# Allegro board gsm.brd
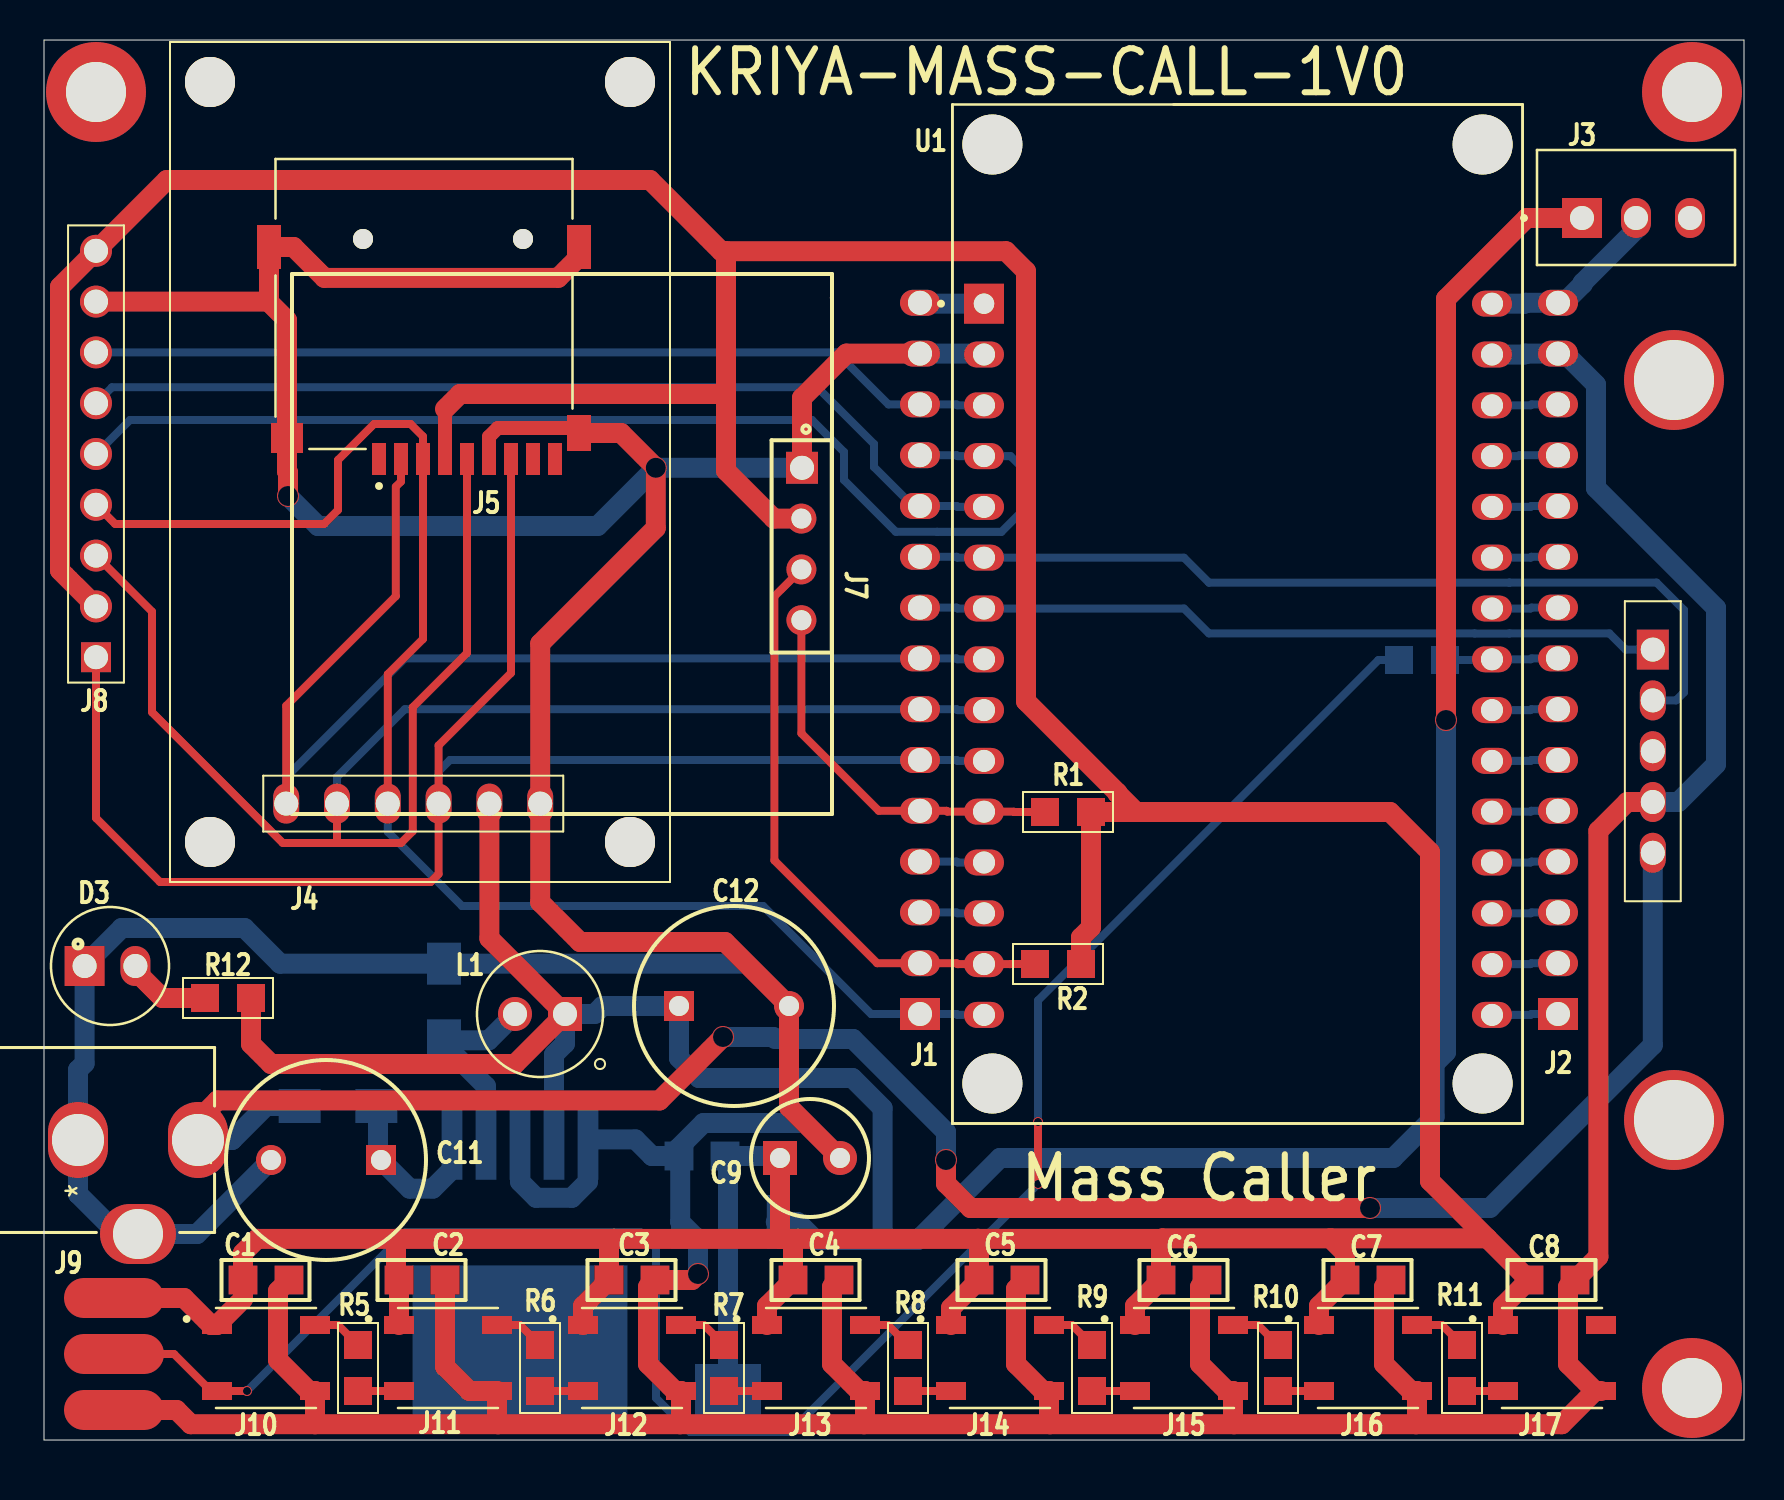
[diagram p0: board, top side]
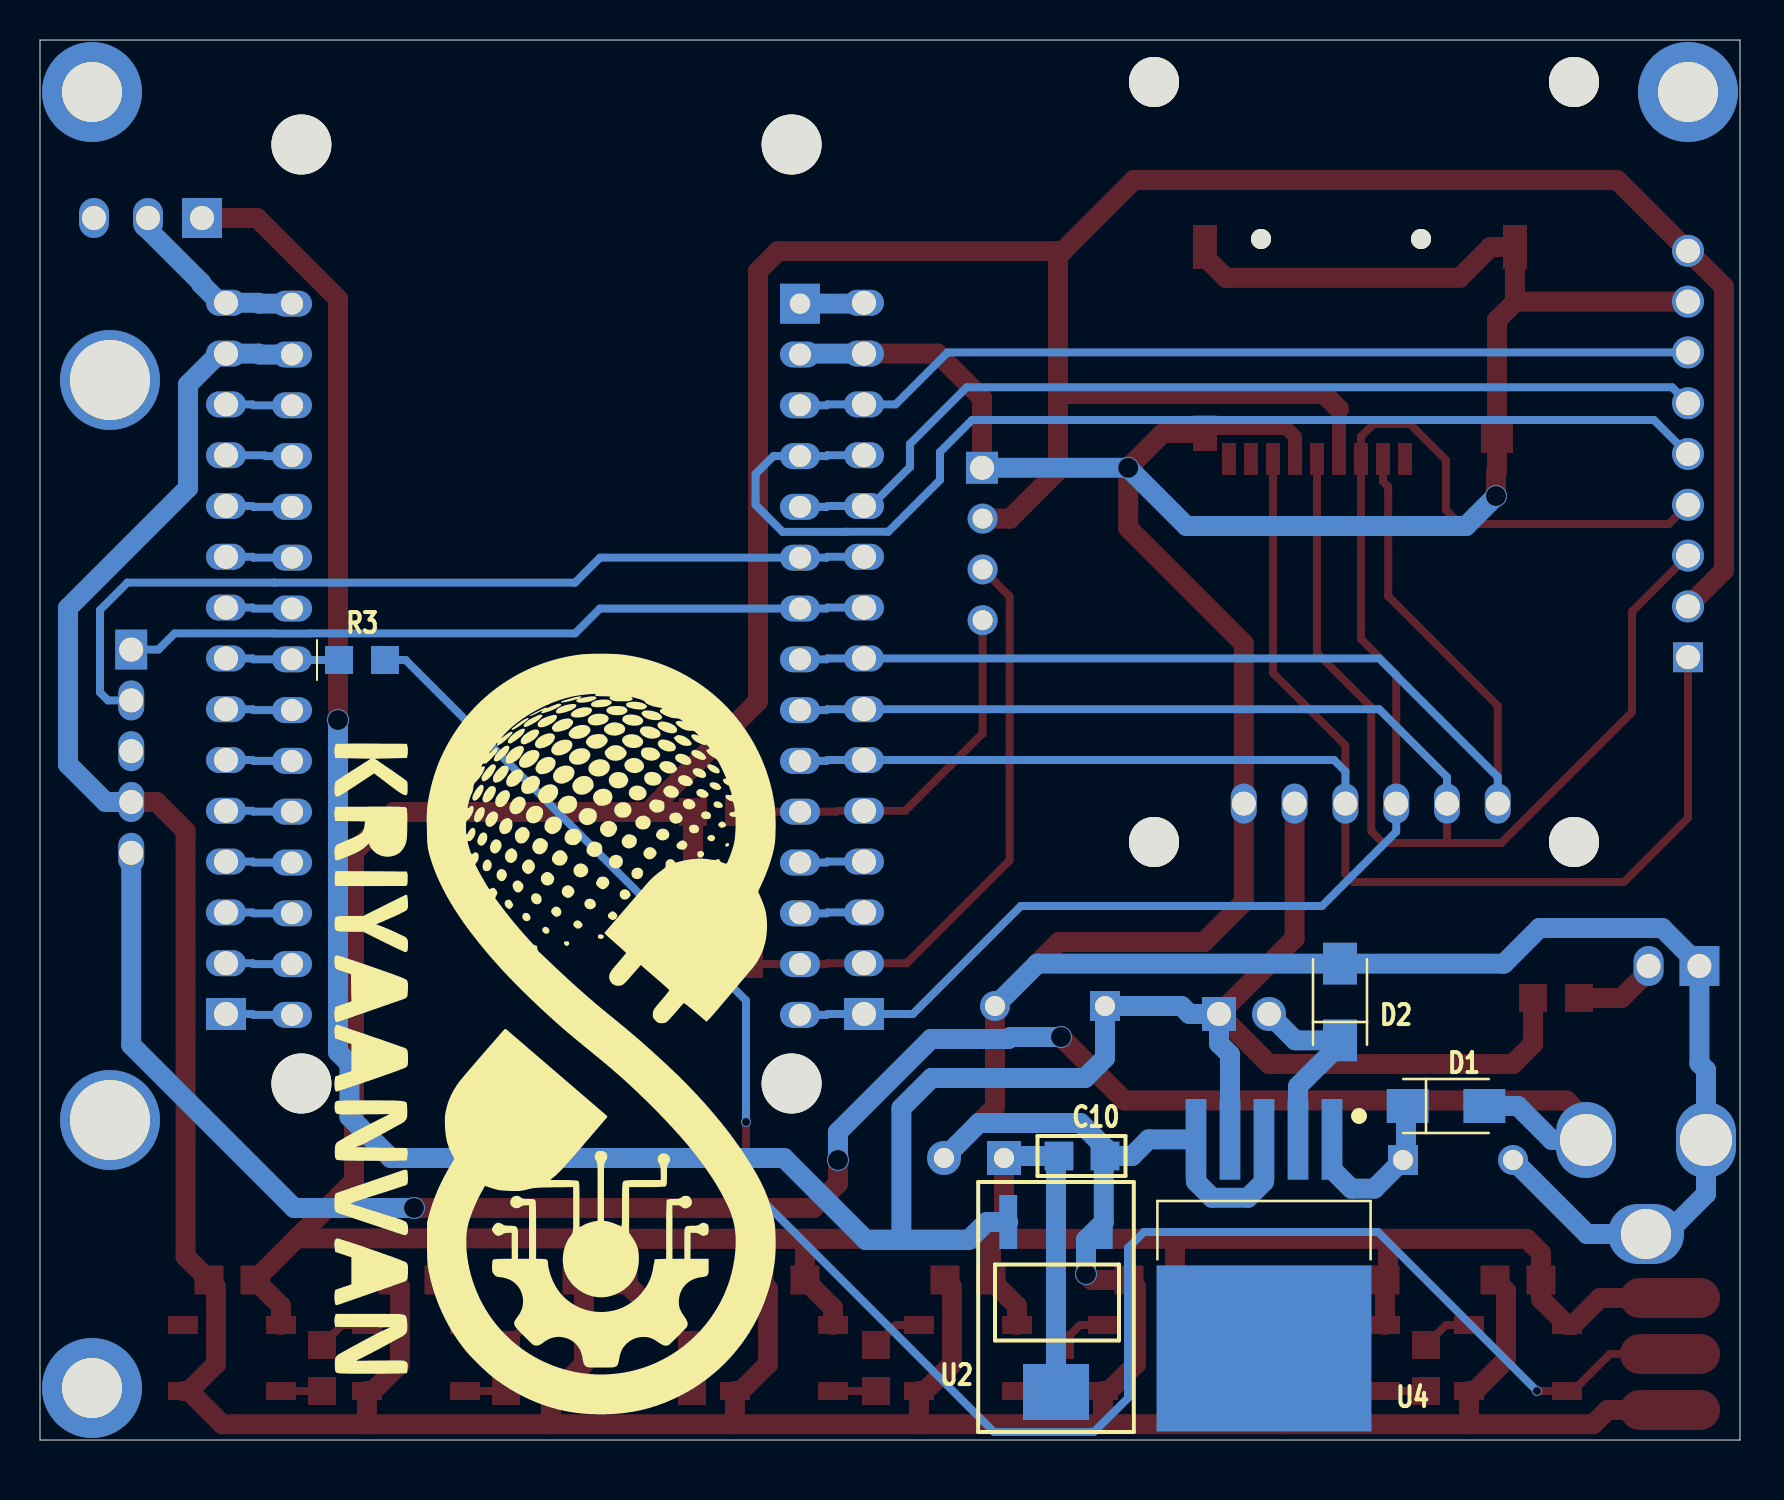
[diagram p1: board, bottom side, seen from below]

Outline 85 x 70 mm; copper layers: TOP, BOTTOM. Coordinates in mm from the lower left corner of the outline.
Outline path: 0,70 0,0 85,0 85,70 0,70

## Design rules (mm)
constraint set DEFAULT: min track width 0.4, pair gap 0.4

## Placement (name value [footprint] x y rotation side)
C1  0.1uf  [SMD_CAP_0805]  11.1 8 0 top
C2  0.1uf  [SMD_CAP_0805]  18.9 8 0 top
C3  0.1uf  [SMD_CAP_0805]  29.4 8 0 top
C4  0.1uf  [SMD_CAP_0805]  38.6 8 0 top
C5  0.1uf  [SMD_CAP_0805]  47.9 8 0 top
C6  0.1uf  [SMD_CAP_0805]  57 8 0 top
C7  0.1uf  [SMD_CAP_0805]  66.2 8 0 top
C8  0.1uf  [SMD_CAP_0805]  75.4 8 0 top
C9  47uF/10V  [TH_CAPACITOR]  36.8 14.1 0 top
C10  0.1uf  [SMD_CAP_0805]  32.9 14.2 180 bottom
C11  100uF/25V/TH  [CAP_TH_1000]  14.1 14 180 top
C12  1000uF/16V/TH  [CAP_TH_1000]  34.5 21.7 0 top
D1  M7  [DIODE_SMD_WITH_SS]  14.7 16.7 180 bottom
D2  SS34  [DIODE_SMD_WITH_SS]  20 21.9 90 bottom
D3  LED  [LED_5MM]  3.3 23.7 0 top
J1  CON15  [COMP_BERG_2_54_POS_15]  43.8 21.3 90 top
J2  CON15  [COMP_BERG_2_54_POS_15]  75.7 21.3 90 top
J3  Sliding_SW  [SWITCH]  79.6 61.1 0 top
J4  Micro SD Card Adapter  [MICRO_SD_C]  6.3 27.9 90 top
J5  CON9  [CUI_MSD-1-A]  19 56.8 180 top
J6  GSM  [SIM800C]  78.5 56 0 top
J7  OLED  [OLED_0_96_WMH]  37.9 44.8 270 top
J8  CON9  [CBOX_9]  2.6 49.3 180 top
J9  CON3  [WS2812_STRIP]  3.5 4.3 0 top
J10  CON4  [WS2812]  11.1 4.1 0 top
J11  CON4  [WS2812]  20.2 4.1 0 top
J12  CON4  [WS2812]  29.4 4.1 0 top
J13  CON4  [WS2812]  38.6 4.1 0 top
J14  CON4  [WS2812]  47.8 4.1 0 top
J15  CON4  [WS2812]  57 4.1 0 top
J16  CON4  [WS2812]  66.2 4.1 0 top
J17  CON4  [WS2812]  75.4 4.1 0 top
J18  JACK_PJ-002B  [PJ-002B_CUI]  7.7 15 90 top
L1  100uH/TH  [TH_INDUCTOR]  24.8 21.3 180 top
NOREF  -  [unnamed]  -156.36 -138.34 0 top
NOREF#2  -  [unnamed]  -236.16 -138.34 0 top
NOREF#3  -  [unnamed]  -156.36 -203.14 0 top
NOREF#4  -  [#2]  -7 153.98 0 top
R1  4.7K/0805  [SMD_RES_0805_23]  51.2 31.4 0 top
R2  4.7K/0805  [SMD_RES_0805_23]  50.7 23.8 0 top
R3  330E  [SMD_RES_0805_23]  68.9 39 180 bottom
R5  100E/0805  [SMD_RES_0805_23]  15.7 3.6 90 top
R6  100E/0805  [SMD_RES_0805_23]  24.8 3.6 90 top
R7  100E/0805  [SMD_RES_0805_23]  34 3.6 90 top
R8  100E/0805  [SMD_RES_0805_23]  43.2 3.6 90 top
R9  100E/0805  [SMD_RES_0805_23]  52.4 3.6 90 top
R10  100E/0805  [SMD_RES_0805_23]  61.7 3.6 90 top
R11  100E/0805  [SMD_RES_0805_23]  70.9 3.6 90 top
R12  1K/0805  [SMD_RES_0805_23]  9.2 22.1 180 top
U1  ESP32 DEV KIT  [MODULE_ESP32_DEVKIT]  59.7 41.3 0 top
U2  LM1117  [SMD_3_3VREGULATOR]  34.2 6.9 180 bottom
U4  SMD LM2576-5  [REGULATOR_LM2576-12WU]  23.8 8.7 0 bottom

## Library data of the parts
C1-C8 = CAPACITOR NON-POL
C9 = CAP
C10 = CAP NP
C11 C12 = CAPACITOR
D1 = DIODE
D2 = DIODE ZENER
D3 = LED
J1 = CON19_6
J2 = CON19_5
J3 J9 = CON3
J4 = CON6
J5 = CON9_5
J6 = CON5
J7 = CON4_2
J8 = CON9
J10-J17 = CON4
J18 = PJ-002B
L1 = INDUCTOR
R1 R2 = R
R3 R5-R12 = RESISTOR
U1 = CON34A_6
U2 = LM1117_5
U4 = LM2576/TO_1

## Footprints (pads in the part's own frame, mm; a bottom-side part is the same pattern mirrored in y, then rotated)
CAP_TH_1000
  rect 1.5x1.5 hole 1: 1(-2.75,0)
  round 1.5 hole 1: 2(2.75,0)
CBOX_9
  rect 1.5x1.5 hole 1.2: 1(0,10.16)
  round 1.6 hole 1.2: 2(0,7.62) 3(0,5.08) 4(0,2.54) 5(0,0) 6(0,-2.54) 7(0,-5.08) 8(0,-7.62) 9(0,-10.16)
COMP_BERG_2_54_POS_15
  rect 1.6x2 hole 1.2: 1(0,0)
  oval 1.3x2 hole 1.2: 2(2.54,0) 3(5.08,0) 4(7.62,0) 5(10.16,0) 6(12.7,0) 7(15.24,0) 8(17.78,0) 9(20.32,0) 10(22.86,0) 11(25.4,0) 12(27.94,0) 13(30.48,0) 14(33.02,0) 15(35.56,0)
CUI_MSD-1-A
  round 1 hole 1 unplated: (-4.95,-3.25) (3.05,-3.25)
  rect 0.7x1.6 smd: 1(2.25,7.75) 2(1.15,7.75) 3(0.05,7.75) 4(-1.05,7.75) 5(-2.15,7.75) 6(-3.25,7.75) 7(-4.35,7.75) 8(-5.45,7.75) CD(-6.55,7.75)
  rect 1.2x1.8 smd: G1(-7.75,6.45)
  rect 1.6x1.5 smd: G2(6.85,6.7)
  rect 1.2x2.2 smd: G3(-7.75,-2.85) G4(7.75,-2.85)
DIODE_SMD_WITH_SS
  rect 2.1x1.7 smd: 1(-1.915,0) 2(1.915,0)
LED_5MM
  rect 2x2 hole 1.2: 1(-1.27,0)
  oval 1.5x2 hole 1.2: 2(1.27,0)
MICRO_SD_C
  round 2.5 hole 2.5: (2,-2) (2,-23) (40,-2) (40,-23)
  oval 2x1.3 hole 1.2: 1(3.92,-5.81) 2(3.92,-8.35) 3(3.92,-10.89) 4(3.92,-13.43) 5(3.92,-15.97) 6(3.92,-18.51)
MODULE_ESP32_DEVKIT
  round 3 hole 3 unplated: (-12.28,23.475) (-12.28,-23.475) (12.23,23.475) (12.23,-23.475)
  rect 2x2 hole 1.02: 1(-12.7,15.515)
  oval 2x1.3 hole 1.1: 2(-12.7,12.975) 3(-12.7,10.435) 4(-12.7,7.895) 5(-12.7,5.355) 6(-12.7,2.815) 7(-12.7,0.275) 8(-12.7,-2.265) 9(-12.7,-4.805) 10(-12.7,-7.345) 11(-12.7,-9.885) 12(-12.7,-12.425) 13(-12.7,-14.965) 14(-12.7,-17.505) 15(-12.7,-20.045) 16(12.7,-20.045) 17(12.7,-17.505) 18(12.7,-14.965) 19(12.7,-12.425) 20(12.7,-9.885) 21(12.7,-7.345) 22(12.7,-4.805) 23(12.7,-2.265) 24(12.7,0.275) 25(12.7,2.815) 26(12.7,5.355) 27(12.7,7.895) 28(12.7,10.435) 29(12.7,12.975) 30(12.7,15.515)
OLED_0_96_WMH
  rect 1.6x1.6 hole 1.2: 1(-3.81,0)
  round 1.5 hole 1: 2(-1.27,-0.03) 3(1.27,-0.03) 4(3.81,-0.03)
PJ-002B_CUI
  oval 3.8x3 hole 2.6: 1(0,0) 2(0,6)
  oval 3x3.8 hole 2.5: 3(-4.7,3)
REGULATOR_LM2576-12WU
  rect 1.041x4.039 smd: 1(-3.4,-6.33) 2(-1.7,-6.33) 3(0,-6.33) 4(1.7,-6.33) 5(3.4,-6.33)
  rect 10.744x8.306 smd: 6(0,4.122)
SIM800C
  round 5 hole 4: (3,-3) (3,-40)
  rect 1.6x2 hole 1.2: 1(1.94,-16.48)
  oval 1.3x2 hole 1.2: 2(1.94,-19.02) 3(1.94,-21.56) 4(1.94,-24.1) 5(1.94,-26.64)
SMD_3_3VREGULATOR
  rect 0.9x2.7 smd: 1(2.39,4) 2(0,4) 3(-2.39,4)
  rect 3.3x2.8 smd: 4(0,-4.5)
SMD_CAP_0805
  rect 1.45x1.45 smd: 1(-1.15,0) 2(1.15,0)
SMD_RES_0805_23
  rect 1.4x1.4 smd: 1(-1.15,0) 2(1.15,0)
SWITCH
  rect 2x2 hole 1.2: 1(-2.7,0)
  oval 1.5x2 hole 1.2: 2(0,0) 3(2.7,0)
TH_CAPACITOR
  rect 1.7x1.7 hole 1: 1(0,0)
  round 1.7 hole 1: 2(3,0)
TH_INDUCTOR
  round 1.7 hole 1.2: 1(1.25,0)
  rect 1.7x1.7 hole 1.2: 2(-1.25,0)
unnamed
  round 5 hole 3: (238.76,205.74)
WS2812
  rect 1.5x0.9 smd: 1(-2.45,1.65) 2(-2.45,-1.65) 3(2.45,-1.65) 4(2.45,1.65)
WS2812_STRIP
  oval 5x2 smd: 1(0,2.8) 2(0,0) 3(0,-2.8)

## Nets
3V3: C1.1 C2.1 C3.1 C4.1 C5.1 C6.1 C7.1 C8.1 C9.1 C10.1 J5.4 J7.2(VCC) J8.2 J8.9 J9.1 J10.1 J11.1 J12.1 J13.1 J14.1 J15.1 J16.1 J17.1 R1.2 R2.2 U2.2 U2.4(VOUT4)
12V: D1.2 J6.5 J18.1
+5V: C12.1 J3.1 J4.5 L1.2 R12.1 U2.3 U4.4
GND: C1.2 C2.2 C3.2 C4.2 C5.2 C6.2 C7.2 C8.2 C9.2 C10.2 C11.2 C12.2 D2.2 D3.1(CATHODE) J1.14 J2.14 J4.6 J5.6(VSS) J5.G1 J5.G2 J5.G3 J5.G4 J6.4 J7.1 J8.8 J9.3 J10.3 J11.3 J12.3 J13.3 J14.3 J15.3 J16.3 J17.3 J18.2 J18.3 U1.2 U1.29 U2.1 U4.3 U4.5
CS_ILI: J1.13 J8.7 U1.3
D/C_ILI: J1.12 J8.5 U1.4
EN: J2.1 U1.16
ESP_3V3: J1.15 U1.1
MISO_ILI: J1.6 J4.4 J5.7 J8.1 U1.10
MOSI_ILI: J1.1 J4.3 J5.3 J8.4 U1.15
RESET_ILI: J1.11 J8.6 U1.5
RX: J1.10 J6.2 U1.6
SCK_ILI: J1.7 J4.2 J5.5 J8.3 U1.9
SCL: J1.2 J7.3 R2.1 U1.14
SDA: J1.5 J7.4 R1.1 U1.11
T_CS: J1.8 J4.1 J5.2 U1.8
TX: J1.9 J6.1 U1.7
WS_IN1: J9.2 J10.2 R3.2
WS_OUT1: J10.4 R5.2
WS_OUT2: J11.4 R6.2
WS_OUT3: J12.4 R7.2
WS_OUT4: J13.4 R8.2
WS_OUT5: J14.4 R9.2
WS_OUT6: J15.4 R10.2
WS_OUT7: J16.4 R11.2
N2742876: J2.15 J3.2 U1.30(VIN)
N2742884: J2.13 U1.28
N2742888: J2.12 U1.27
N2742892: J2.11 U1.26
N2742896: J2.10 U1.25
N2742900: J2.9 U1.24
N2742904: J2.8 R3.1 U1.23
N2742908: J2.7 U1.22
N2742912: J2.6 U1.21
N2742916: J2.5 U1.20
N2742920: J2.4 U1.19
N2742924: J2.3 U1.18
N2742928: J2.2 U1.17
N2742950: J1.3 U1.13
N2742954: J1.4 U1.12
N2860818: C11.1 D1.1(K) U4.1(VIN)
N2860900: D2.1(CATHODE) L1.1 U4.2
N2865417: J11.2 R5.1
N2865707: J12.2 R6.1
N2866012: J13.2 R7.1
N2866325: J14.2 R8.1
N2873565: J15.2 R9.1
N2873897: J16.2 R10.1
N2874241: J17.2 R11.1
N28757371: D3.2 R12.2

Pads without a net: J3 3; J5 1 8 CD; J6 3; J17 4; U4 6

## Via types
v1: diameter 1.1, hole 1, TOP to BOTTOM, 7 vias
v2: diameter 0.5, hole 0.4, TOP to BOTTOM, 3 vias

## Routing (per net, layer and track width the routed paths; a pad name or vN(x,y) marks a point on that pad's centre or on a via; arc(x,y) is an arc through that point)
3V3: length 303.1
  TOP w0.7: J5.4 20.05,51.55
  TOP w1: 37.7,10.06 36.8,10.06 ; 37.7,10.06 46.7,10.06 ; 37.7,10.06 37.45,9.81 C4.1 36.15,6.7 J13.1 ; 36.8,10.06 28.5,10.06 ; 36.8,10.06 C9.1 ; J17.1 72.95,6.7 C8.1 72.17,10.08 ; 64.32,10.08 72.17,10.08 ; 64.32,10.08 55.92,10.08 55.9,10.06 ; 64.32,10.08 65.05,9.35 C7.1 63.75,6.7 J16.1 ; 72.17,10.08 69.3,12.95 69.3,29.4 67.3,31.4 54.6,31.4 ; 34.1,52.3 20.8,52.3 20.05,51.55 ; 34.1,52.3 34.1,48.46 36.49,46.07 J7.2 ; 34.1,52.3 34.1,59.44 ; 28.5,10.06 17.6,10.06 ; 28.5,10.06 28.25,9.81 C3.1 26.95,6.7 J12.1 ; J14.1 45.35,6.6 C5.1 46.75,10.01 46.7,10.06 ; 17.6,10.06 17.6,8.15 C2.1 J11.1 ; 17.6,10.06 10.66,10.06 9.95,9.35 C1.1 9.95,7.05 J10.1 8.35,5.75 7,7.1 J9.1 ; J15.1 54.55,6.7 C6.1 55.85,10.01 55.9,10.06 ; 55.9,10.06 46.7,10.06 ; 54.6,31.4 53.68,32.32 53.68,32.36 49.1,36.94 49.1,58.44 48.1,59.44 34.1,59.44 ; 54.6,31.4 R1.2 52.35,25.63 51.85,25.13 R2.2 ; 34.1,59.44 33.86,59.44 30.3,63 6.14,63 J8.9 0.8,57.66 0.8,43.48 J8.2
  BOTTOM w1: U2.4 U2.2 34.2,14.05 C10.1 36.7,14.2 C9.1
12V: length 99.3
  TOP w1: J18.1 7.7,16 8.67,16.98 30.78,16.98 v1(33.95,20.15) ; v1(45.1,14) 45.1,12.82 46.32,11.6 v1(66.3,11.6)
  BOTTOM w1: v1(33.95,20.15) 36.47,20.15 36.57,20.05 40.45,20.05 45.1,15.4 v1(45.1,14) ; D1.2 11.11,16.7 9.41,15 J18.1 ; J6.5 80.44,19.75 72.29,11.6 v1(66.3,11.6)
+5V: length 149.8
  TOP w1: v1(70.1,36) 70.1,57.06 74.14,61.1 J3.1 ; J4.5 22.27,25.08 L1.2 23.55,18.8 11.35,18.8 10.35,19.8 R12.1
  BOTTOM w1: v1(70.1,36) 70.1,19.39 69.53,18.82 69.53,16.17 67.46,14.1 47.8,14.1 43.7,10 41.93,10 ; U4.4 25.5,19.27 26.05,19.82 L1.2 27.53,21.3 27.93,21.7 C12.1 31.75,19.1 32.75,18.1 40.42,18.1 41.93,16.59 41.93,10 ; U2.3 37.67,10.9 38.57,10 41.93,10
GND: length 427.9
  TOP w0.7: J5.6 22.25,50.16 22.69,50.6 26.5,50.6 J5.G1
  TOP w1: J5.G1 28.85,50.35 v1(30.59,48.61) 30.59,45.6 24.81,39.82 J4.6 24.81,26.89 26.8,24.9 34.05,24.9 C12.2 37.25,16.65 C9.2 ; J5.G3 26.75,59.15 25.71,58.11 14.02,58.11 12.48,59.65 J5.G4 11.25,56.95 11.22,56.92 ; 13.55,0.79 7.34,0.79 6.63,1.5 J9.3 ; 13.55,0.79 22.7,0.79 ; 13.55,0.79 J10.3 13.25,2.45 11.7,4 11.7,7.45 C1.2 ; C4.2 39.4,7.65 39.4,3.8 40.75,2.45 J13.3 41.05,0.84 41,0.79 ; 22.7,0.79 22.65,0.84 J11.3 21.27,2.45 20.05,3.67 C2.2 ; 22.7,0.79 31.8,0.79 ; v1(32.7,8.3) 32.4,8 C3.2 30.2,7.65 30.2,3.8 31.55,2.45 J12.3 31.85,0.84 31.8,0.79 ; 31.8,0.79 41,0.79 ; 11.22,56.92 12.15,55.99 J5.G2 12.15,48.43 12.2,48.38 v1(12.2,47.2) ; 11.22,56.92 J8.8 ; 68.6,0.79 75.89,0.79 77.55,2.45 ; 68.6,0.79 59.5,0.79 ; 68.6,0.79 68.65,0.84 J16.3 68.35,2.45 67,3.8 67,7.65 C7.2 ; C5.2 48.6,7.55 48.6,3.8 49.95,2.45 J14.3 50.25,0.84 50.3,0.79 ; 77.55,2.45 J17.3 ; 77.55,2.45 76.2,3.8 76.2,7.65 C8.2 77.72,9.17 77.72,30.46 79.16,31.9 J6.4 ; 50.3,0.79 41,0.79 ; 50.3,0.79 59.5,0.79 ; C6.2 57.8,7.65 57.8,3.8 59.15,2.45 J15.3 59.45,0.84 59.5,0.79 ; J7.1 37.9,52.1 40.12,54.32 J1.14
  BOTTOM w1: U4.3 23.8,12.92 24.61,12.11 26.39,12.11 27.2,12.92 U4.5 29.57,15.03 30.4,14.2 C10.2 ; J7.1 v1(30.59,48.61) 27.68,45.7 13.7,45.7 v1(12.2,47.2) ; C12.2 35.13,23.81 D2.2 11.81,23.81 10.02,25.6 3.89,25.6 2.03,23.74 D3.1 2.03,18.84 1.7,18.51 J18.2 1.7,12.3 3.7,10.3 J18.3 7.65,10.3 C11.2 ; U1.29 74.03,54.27 74.07,54.32 J2.14 76.05,54.32 77.6,52.77 77.6,47.6 83.6,41.6 83.6,33.78 81.72,31.9 J6.4 ; C10.2 31.75,14.62 32.98,15.85 38.05,15.85 C9.2 ; C10.2 31.81,14.14 U2.1 32.7,10.01 v1(32.7,8.3) ; U1.2 46.95,54.32 J1.14
CS_ILI: length 45.5
  BOTTOM w0.4: J8.7 39.62,54.38 42.22,51.78 J1.13 45.63,51.78 45.67,51.73 U1.3
D/C_ILI: length 58.4
  BOTTOM w0.4: J8.5 4.3,51 38.4,51 40,49.4 40,48 42.59,45.41 44.67,45.41 44.67,45.41 47.87,45.41 49.22,46.76 49.22,48.3 48.33,49.2 U1.4 45.67,49.2 45.63,49.24 J1.12
EN: length 3.3
  BOTTOM w0.4: J2.1 74.37,21.3 74.33,21.26 72.4,21.26
ESP_3V3: length 3.2
  BOTTOM w1: J1.15 43.84,56.81 U1.1
MISO_ILI: length 78
  TOP w0.4: J5.7 23.35,38.35 19.73,34.73 J4.4 19.73,28.3 19.33,27.9 5.8,27.9 2.6,31.1 J8.1
  BOTTOM w0.4: J4.4 19.73,33.43 20.3,34 J1.6 45.63,34 45.67,33.95 U1.10
MOSI_ILI: length 74.6
  TOP w0.4: J8.4 3.56,45.8 14,45.8 14.7,46.5 14.7,49 16.5,50.8 18.33,50.8 18.95,50.18 J5.3 18.95,40.05 17.19,38.29 J4.3
  BOTTOM w0.4: 47,21.26 45.67,21.26 45.63,21.3 J1.1 41.36,21.3 35.96,26.7 20.9,26.7 17.19,30.41 J4.3
RESET_ILI: length 47.9
  BOTTOM w0.4: U1.5 45.67,46.66 45.63,46.7 J1.11 43.45,46.7 41.5,48.65 41.5,49.8 38.66,52.64 3.4,52.64 J8.6
RX: length 45.2
  BOTTOM w0.4: J1.10 45.63,44.16 45.67,44.11 U1.6 57,44.11 58.25,42.86 73.27,42.86 73.27,42.87 80.63,42.87 82,41.5 82,37.38 81.6,36.98 J6.2
SCK_ILI: length 81.8
  TOP w0.4: J5.5 21.15,39.35 18.44,36.64 18.44,30.44 17.85,29.85 14.65,29.85 ; 14.65,29.85 11.94,29.85 5.4,36.39 5.4,41.42 J8.3 ; 14.65,29.85 J4.2
  BOTTOM w0.4: U1.9 45.67,36.49 45.63,36.54 J1.7 18.04,36.54 14.65,33.15 J4.2
SCL: length 30.3
  TOP w0.4: J7.3 36.52,42.18 36.52,28.98 41.66,23.84 J1.2 45.63,23.84 45.67,23.8 U1.14 48.33,23.8 48.33,23.8 R2.1
SDA: length 19.5
  TOP w0.4: R1.1 48.51,31.4 48.49,31.41 U1.11 45.17,31.41 45.13,31.46 J1.5 41.74,31.46 37.87,35.33 J7.4
T_CS: length 58.3
  TOP w0.4: J5.2 17.85,47.92 17.59,47.66 17.59,42.19 12.11,36.71 J4.1
  BOTTOM w0.4: J4.1 12.11,33.15 18.04,39.08 J1.8 45.63,39.08 45.67,39.03 U1.8
TX: length 37.5
  BOTTOM w0.4: J6.1 79.08,39.52 78.27,40.33 73.27,40.33 73.27,40.33 71.53,40.33 71.53,40.33 58.24,40.33 57,41.58 U1.7 45.67,41.58 45.63,41.62 J1.9
WS_IN1: length 98.2
  TOP w0.4: v2(10.15,2.45) J10.2 8.35,2.45 6.5,4.3 J9.2 ; v2(49.7,15.9) v2(49.7,12.8)
  BOTTOM w0.4: v2(10.15,2.45) 18.1,10.4 29.8,10.4 30.6,9.6 30.6,2.1 32.3,0.4 37.3,0.4 v2(49.7,12.8) ; v2(49.7,15.9) 49.7,21.98 66.72,39 R3.2
WS_OUT1: length 2.6
  TOP w0.4: J10.4 14.7,5.75 R5.2
WS_OUT2: length 2.6
  TOP w0.4: R6.2 23.8,5.75 J11.4
WS_OUT3: length 2.6
  TOP w0.4: J12.4 33,5.75 R7.2
WS_OUT4: length 2.6
  TOP w0.4: R8.2 42.2,5.75 J13.4
WS_OUT5: length 2.6
  TOP w0.4: J14.4 51.4,5.75 R9.2
WS_OUT6: length 2.7
  TOP w0.4: J15.4 60.7,5.75 R10.2
WS_OUT7: length 2.7
  TOP w0.4: J16.4 69.9,5.75 R11.2
N2742876: length 9.3
  BOTTOM w1: J3.2 79.6,60.53 76.94,57.87 76.94,57.8 76,56.86 J2.15 74.07,56.86 74.03,56.81 U1.30
N2742884: length 3.3
  BOTTOM w0.4: J2.13 74.37,51.78 74.33,51.73 U1.28
N2742888: length 3.3
  BOTTOM w0.4: J2.12 73.77,49.24 73.73,49.2 U1.27
N2742892: length 3.3
  BOTTOM w0.4: U1.26 74.33,46.66 74.37,46.7 J2.11
N2742896: length 3.3
  BOTTOM w0.4: J2.10 74.37,44.16 74.33,44.11 U1.25
N2742900: length 3.3
  BOTTOM w0.4: J2.9 74.37,41.62 74.33,41.58 U1.24
N2742904: length 5.7
  BOTTOM w0.4: J2.8 74.37,39.08 74.33,39.03 U1.23 72.36,39 R3.1
N2742908: length 3.3
  BOTTOM w0.4: U1.22 74.33,36.49 74.37,36.54 J2.7
N2742912: length 3.3
  BOTTOM w0.4: J2.6 74.37,34 74.33,33.95 U1.21
N2742916: length 3.3
  BOTTOM w0.4: U1.20 74.33,31.41 74.37,31.46 J2.5
N2742920: length 3.3
  BOTTOM w0.4: J2.4 74.37,28.92 74.33,28.88 U1.19
N2742924: length 3.3
  BOTTOM w0.4: U1.18 74.33,26.34 74.37,26.38 J2.3
N2742928: length 3.3
  BOTTOM w0.4: J2.2 74.37,23.84 74.33,23.8 U1.17
N2742950: length 3.2
  BOTTOM w0.4: J1.3 45.63,26.38 45.67,26.34 U1.13
N2742954: length 3.2
  BOTTOM w0.4: U1.12 45.67,28.88 45.63,28.92 J1.4
N2860818: length 8.8
  BOTTOM w1: U4.1 20.4,13.53 19.44,12.57 18.28,12.57 C11.1 16.7,14.15 16.7,16.62 D1.1
N2860900: length 9.9
  BOTTOM w1: U4.2 22.1,17.69 20,19.78 D2.1 22.23,19.98 L1.1
N2865417: length 2.1
  TOP w0.4: R5.1 J11.2
N2865707: length 2.1
  TOP w0.4: R6.1 J12.2
N2866012: length 2.1
  TOP w0.4: J13.2 R7.1
N2866325: length 2.1
  TOP w0.4: J14.2 R8.1
N2873565: length 2.1
  TOP w0.4: R9.1 J15.2
N2873897: length 2
  TOP w0.4: R10.1 J16.2
N2874241: length 2
  TOP w0.4: R11.1 J17.2
N28757371: length 4.3
  TOP w1: R12.2 5.92,22.1 4.57,23.45 D3.2

## Text on the board
Ref Des/Silkscreen Top: KRIYA-MASS-CALL-1V0 | Mass Caller
NCLEGEND-BL-1-2: FIGURE | FINISHED_SIZE | 0.4 | 1.0 | 1.02 | 1.1 | 1.2 | 2.5 | 2.6 | 3.0 | 4.0 | BY LAYER: TOP to BOTTOM | ALL UNITS ARE IN MILLIMETERS | DRILLED_SIZE | - | 1.3 | 2.7 | PLATED | NON-PLATED | QTY | 3 | 7 | 9 | 1 | 29 | 2 | 35 | 6 | 4 | 125 | TOTAL HOLES:
